# Altium PCB sumobot.PcbDoc
Units mm, origin at the board's own origin, x right, y up, seen from the top; angles counter-clockwise.
Board outline 94 x 94.75 mm, 2 copper layers (Top Layer, Bottom Layer); 86 components, 75 nets, 343 pads, 114 vias.
Unrouted connection lines stored in the file: 2.
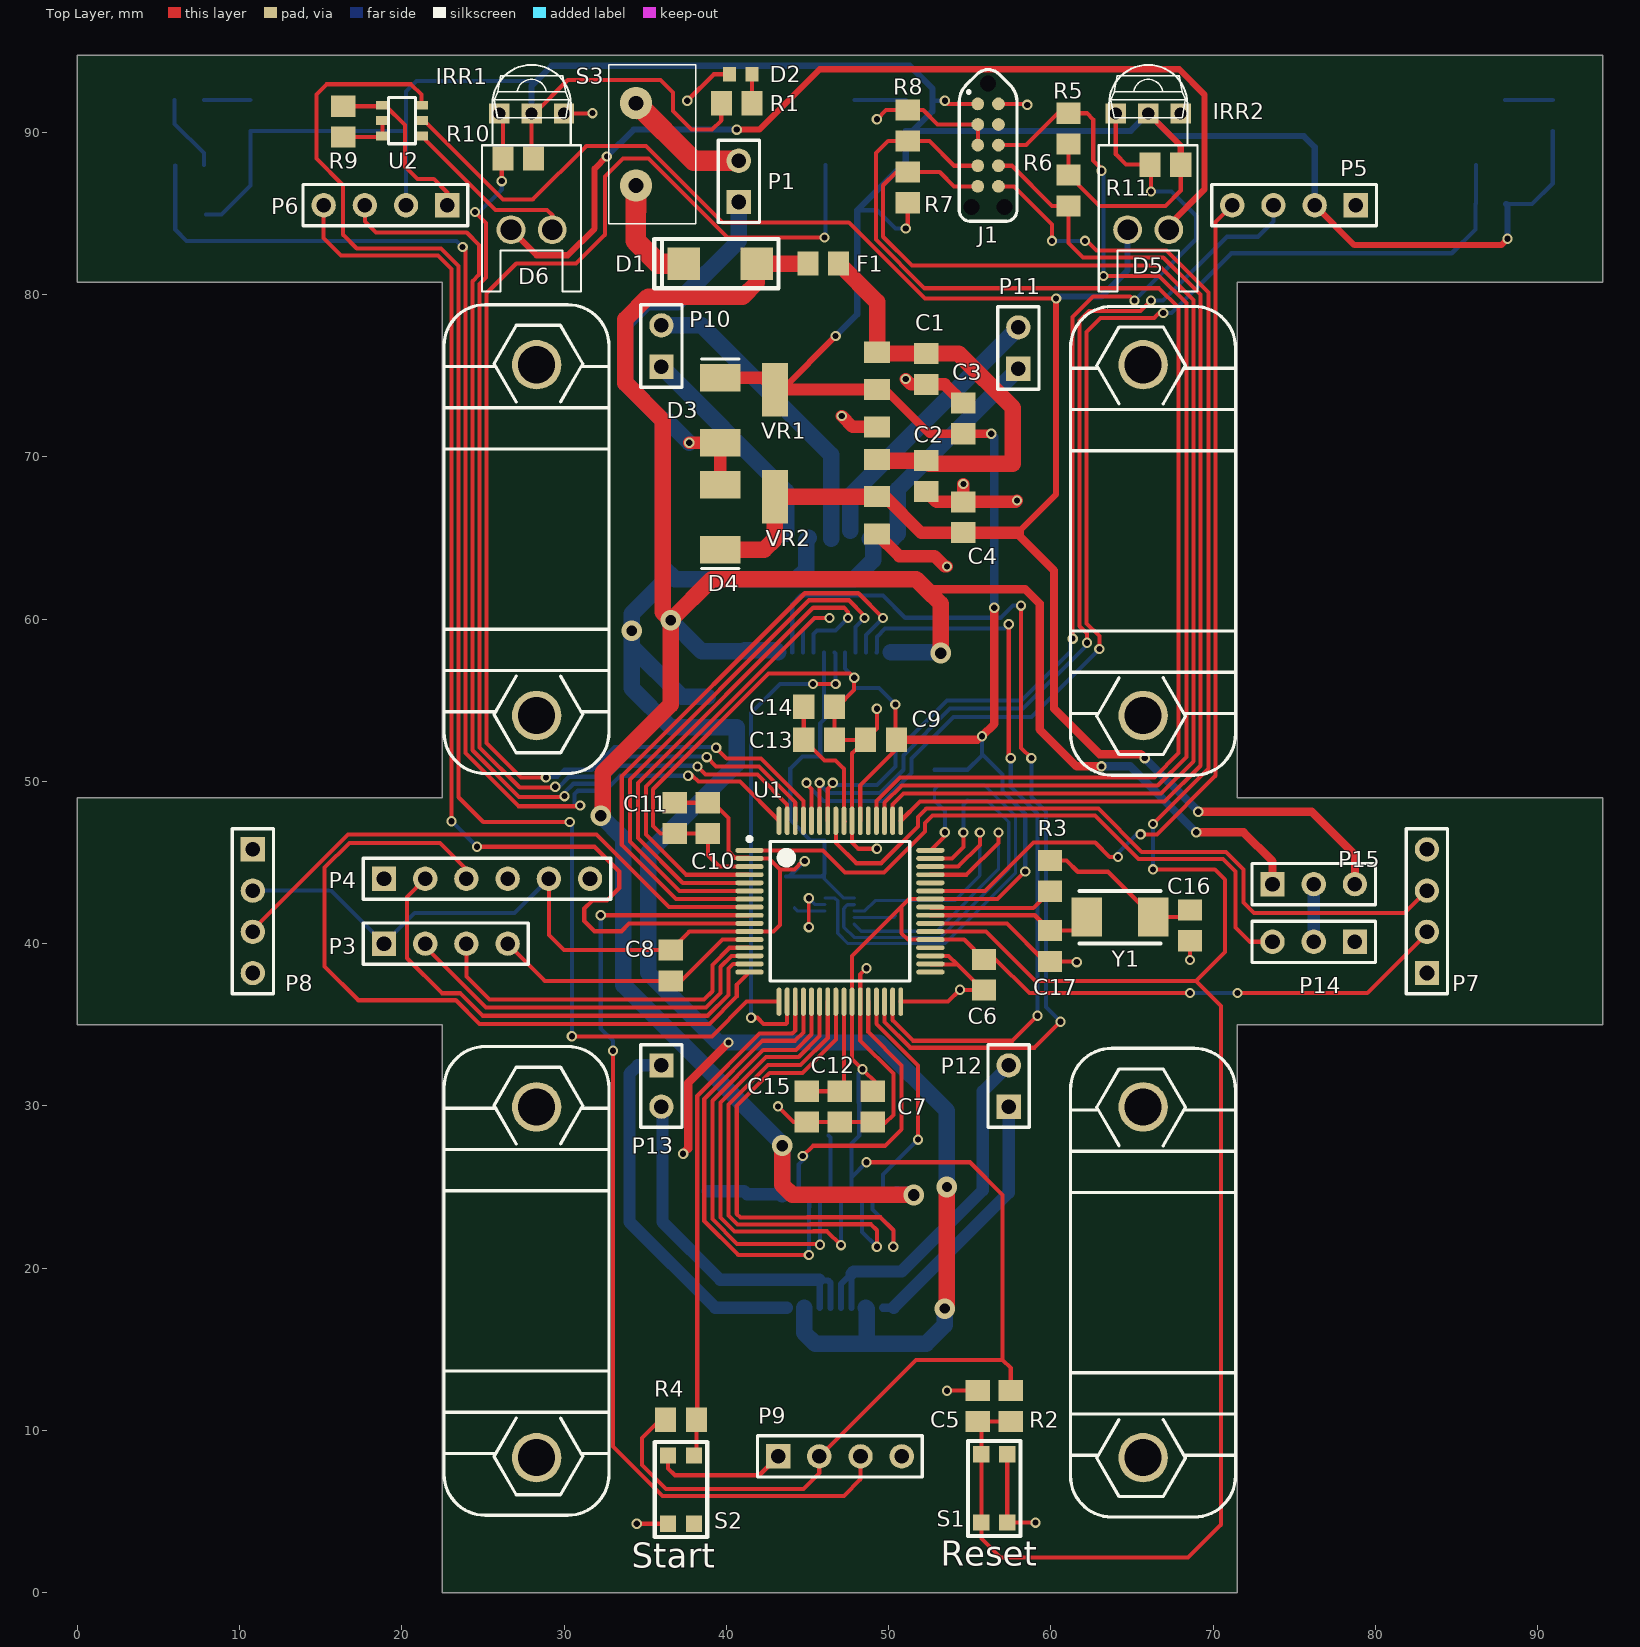
[diagram p0: Top Layer view]
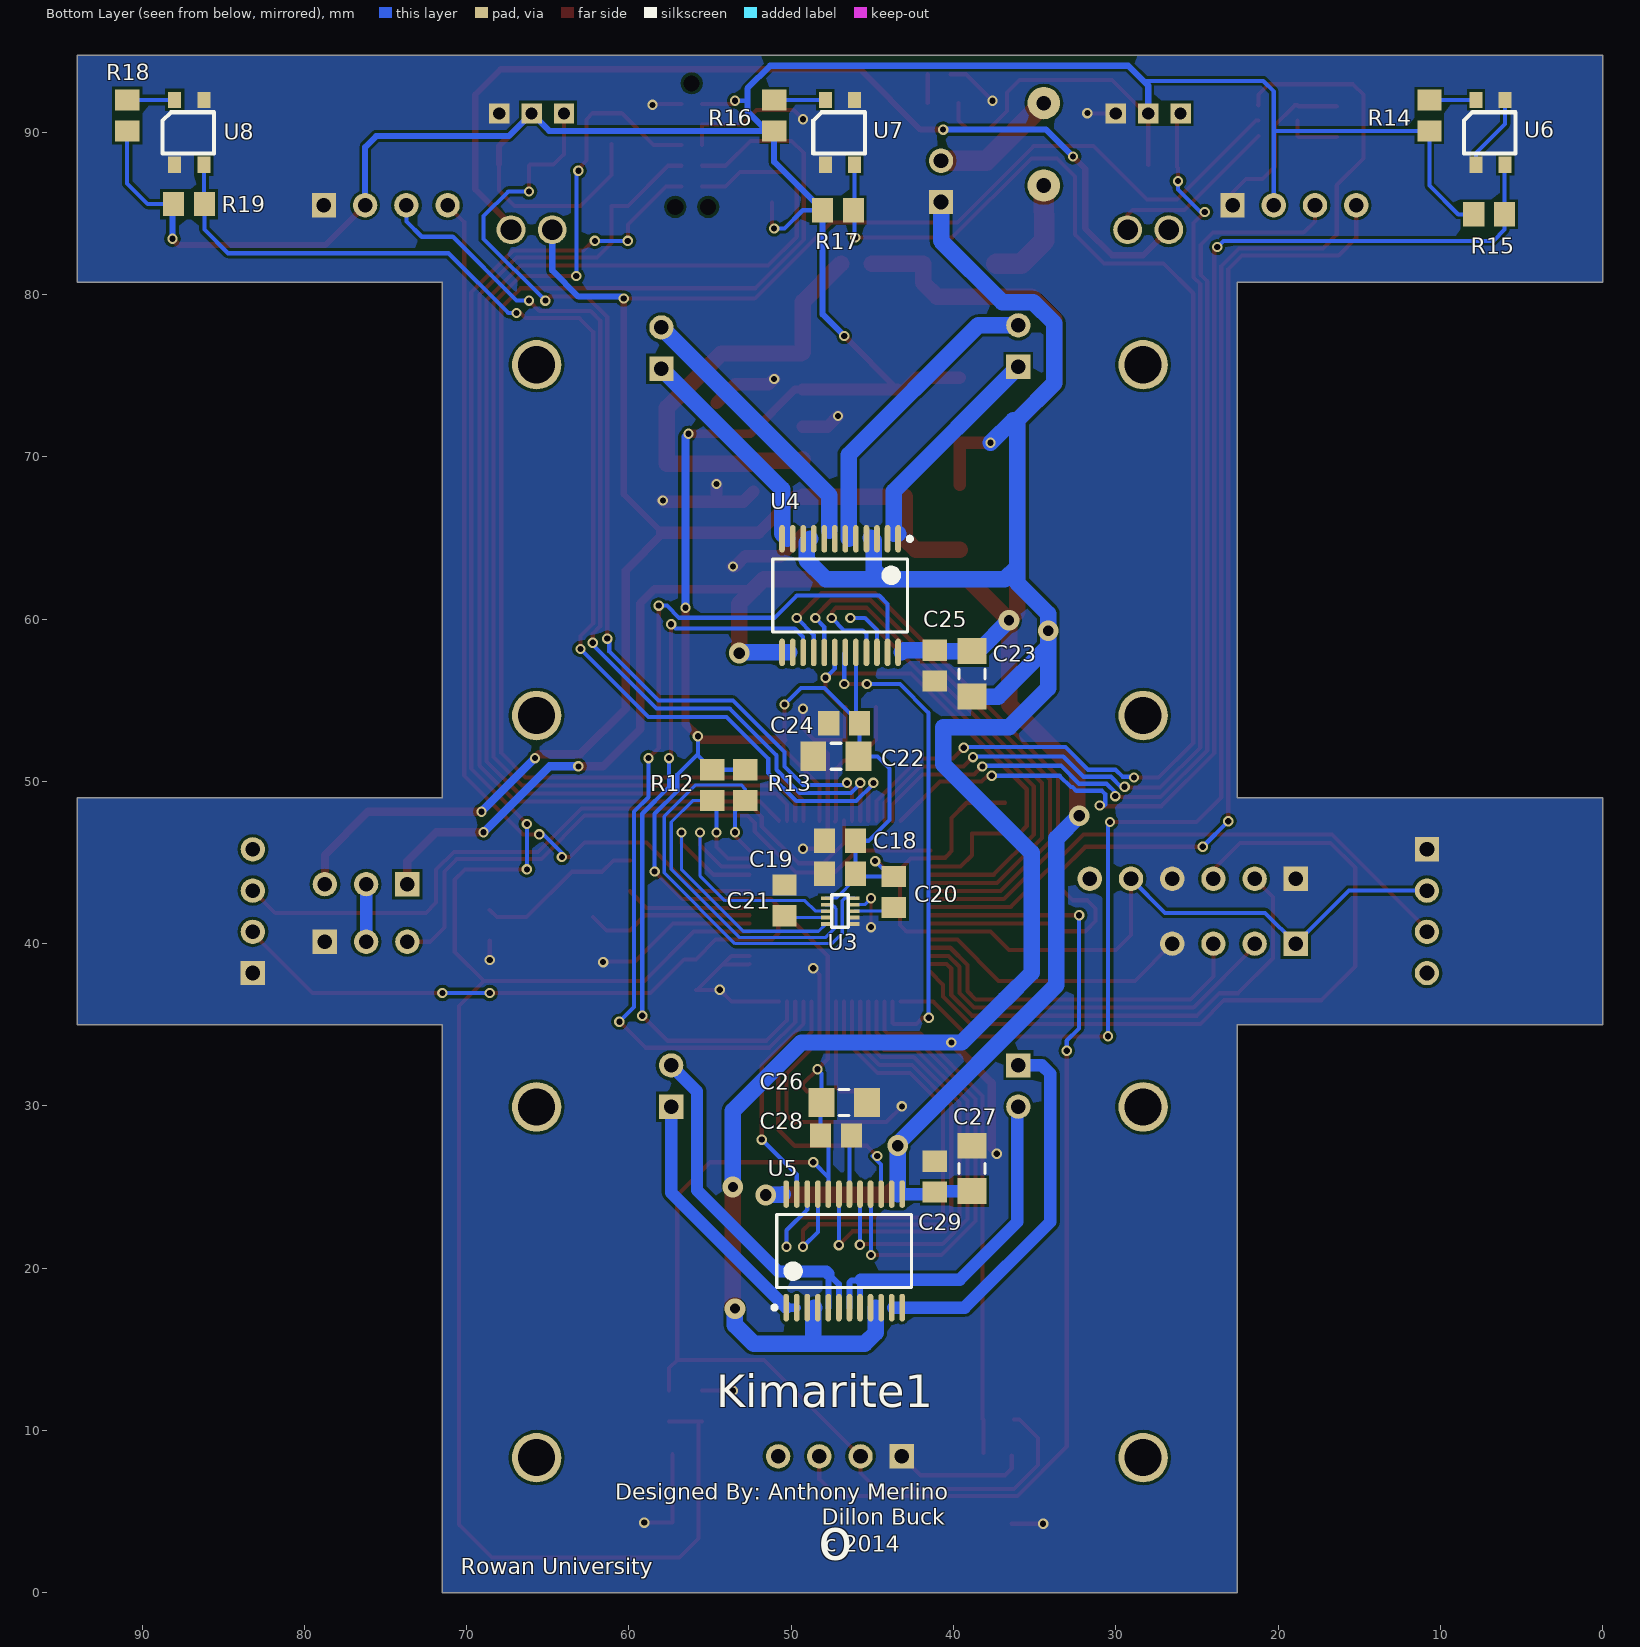
[diagram p1: Bottom Layer view, seen from below]

## Layer stack, top to bottom
Top Solder: solder mask 0.0102, Solder Resist, Dk 3.5
Top Layer: signal copper 0.0356
Dielectric 1: dielectric 0.32, FR-4, Dk 4.8
Bottom Layer: signal copper 0.0356
Bottom Solder: solder mask 0.0102, Solder Resist, Dk 3.5

## Board outline
22.5,0 22.5,35 0,35 0,49 22.5,49 22.5,80.75 0,80.75 0,94.75 94,94.75 94,80.75 71.5,80.75 71.5,49 94,49 94,35 71.5,35 71.5,0

## Design rules (kind name [scope] priority, off if disabled: settings)
Clearance [All] p1: gap=0.178
ComponentClearance [All] p1 off: gap=0.254 collisioncheckmode=3 verticalgap=0.254 showdistances=FALSE
MinimumSolderMaskSliver [All] p1 off: minsoldermaskwidth=0.254
MinimumSolderMaskSliver SilkscreenOverComponentPads [All] p2 off: minsoldermaskwidth=0.254
PlaneConnect [All] p1: planeconnectstyle=Direct reliefexpansion=0.508 reliefentries=4 reliefconductorwidth=0.254 reliefairgap=0.254
PolygonConnect [All] p1: connectstyle=Direct reliefconductorwidth=0.254 reliefentries=4 polygonreliefangle="90 Angle" airgapwidth=0.254
RoutingVias [All] p1: holewidth=0.711 width=1.27 viastyle="Through Hole" minholewidth=0.203 minwidth=0.508 maxholewidth=0.965 maxwidth=1.27
SilkToSilkClearance [All] p1 off: silktosilkclearance=0.254
SolderMaskExpansion [All] p1: expansion=0.102
UnpouredPolygon [All] p1: allowunpoured=FALSE
Width [All] p1: maxlimit=1.27 minlimit=0.178 preferedwidth=0.203
25 further rules are at their usual default settings.

## Classes and differential pairs
component class Servo: P14 P15
component class Reflective_Sensors: R14 R15 R16 R17 R18 R19 U6 U7 U8
component class Proximity_Sensors: D5 IRR1 IRR2 P5 P6 P7 P8 P9 R9 R10 R11 U2
component class Power_Regulation: C1 C2 C3 C4 D1 D2 D3 D4 F1 P1 R1 S3 VR1 VR2
component class Motor_Control: C22 C23 C24 C25 C26 C27 C28 C29 P10 P11 P12 P13 U4 U5
component class microcontroller: C5 C6 C7 C8 C9 C10 C11 C12 C13 C14 C15 C16 C17 J1 P3 P4 R2 R3 R4 R5 R6 R7 R8 S1 S2 Y1
component class Accelerometer: C18 C19 C20 C21 R12 R13 U3

## Components (designator, comment, footprint, x,y, rotation, side; value= is the part's Value field where it differs from the comment)
C1 "Cap" 0805 52.324,75.422 r90 top
C2 "Cap" 0805 52.324,68.818 r90 top
C3 "Cap" 0805 54.61,72.374 r270 top
C4 "Cap" 0805 54.61,66.278 r270 top
C5 "Cap" 0805 55.499,11.512 r270 top
C6 "Cap" 0805 55.88,38.084 r90 top
C7 "Cap" 0805 49.022,29.956 r90 top
C8 "Cap" 0805 36.576,38.658 r90 top
C9 "Cap" 0805 49.53,52.562 r0 top
C10 "Cap" 0805 38.862,47.736 r90 top
C11 "Cap" 0805 36.83,47.736 r90 top
C12 "Cap" 0805 46.99,29.956 r90 top
C13 "Cap" 0805 45.72,52.562 r180 top
C14 "Cap" 0805 45.72,54.594 r180 top
C15 "Cap" 0805 44.958,29.956 r90 top
C16 "Cap" 0805 68.58,41.132 r90 top
C17 "Cap" 0805 59.944,39.862 r90 top
C18 "Cap" 0805 46.99,46.339 r180 bottom
C19 "Cap" 0805 46.99,44.307 r180 bottom
C20 "Cap" 0805 43.688,43.18 r90 bottom
C21 "Cap" 0805 50.419,42.672 r270 bottom
C22 "Cap Pol" 1206 47.244,51.546 r0 bottom
C23 "Cap Pol" 1206 38.862,56.626 r270 bottom
C24 "Cap" 0805 46.736,53.578 r180 bottom
C25 "Cap" 0805 41.148,57.134 r90 bottom
C26 "Cap Pol" 1206 46.736,30.21 r180 bottom
C27 "Cap Pol" 1206 38.862,26.146 r90 bottom
C28 "Cap" 0805 47.244,28.178 r0 bottom
C29 "Cap" 0805 41.148,25.638 r270 bottom
D1 "Diode" SMA 39.624,81.915 r0 top
D2 "LED" 0603 40.894,93.583 r180 top
D3 "3.9V" DO-214AC 39.624,72.882 r270 top
D4 "5.5V" DO-214AC 39.624,66.278 r90 top
D5 "LED" LED-Bent 66,84 r180 top
D6 "LED" LED-Bent 28,84 r180 top
F1 "Fuse" 0805 45.974,81.915 r180 top
IRR1 "TSL262R" TSL262R 28,92 r180 top
IRR2 "TSL262R" TSL262R 66,92 r180 top
J1 "JTAG" "TAG Connect 10p" 56.134,91.755 r270 top
P1 "Header 2" HDR1X2 40.767,85.709 r90 top
P3 "UART_DEBUG" HDR1X4 18.9,40 r0 top locked
P4 "BLUETOOTH MODULE" HDR1X6 18.9,44 r0 top
P5 "Header 4" HDR1X4 78.8,85.51 r180 top
P6 "Header 4" HDR1X4 22.8,85.51 r180 top
P7 "Header 4" HDR1X4 83.18,38.19 r90 top
P8 "Header 4" HDR1X4 10.82,45.81 r270 top
P9 "Header 4" HDR1X4 43.19,8.4 r0 top locked
P10 "Header 2" HDR1X2 36,75.565 r90 top
P11 "Header 2" HDR1X2 58,75.438 r90 top
P12 "Header 2" HDR1X2 57.404,29.956 r90 top
P13 "Header 2" HDR1X2 36,32.496 r270 top
P14 "Header 3" HDR1X3 78.74,40.116 r180 top
P15 "Header 3" HDR1X3 73.66,43.672 r0 top
R1 "Resistor" 0805 40.64,91.805 r180 top
R2 "Resistor" 0805 57.531,11.512 r90 top
R3 "Resistor" 0805 59.944,44.18 r270 top
R4 "Resistor" 0805 37.211,10.668 r180 top
R5 "Resistor" 0805 61.087,90.231 r270 top
R6 "Resistor" 0805 61.087,86.421 r90 top
R7 "Resistor" 0805 51.181,86.614 r270 top
R8 "Resistor" 0805 51.181,90.424 r270 top
R9 "Resistor" 0805 16.383,90.662 r270 top
R10 "Resistor" 0805 27.178,88.392 r180 top
R11 "Resistor" 0805 67.056,88.011 r180 top
R12 "Resistor" 0805 54.864,49.768 r90 bottom
R13 "Resistor" 0805 52.832,49.768 r90 bottom
R14 "Resistor" 0805 10.668,91.043 r270 bottom
R15 "Resistor" 0805 6.985,84.947 r0 bottom
R16 "Resistor" 0805 51.054,91.043 r270 bottom
R17 "Resistor" 0805 47.117,85.201 r0 bottom
R18 "Resistor" 0805 90.932,91.043 r270 bottom
R19 "Resistor" 0805 87.122,85.582 r0 bottom
S1 "KMR4" KMR4 56.515,6.432 r270 top
S2 "KMR4" KMR4 37.211,6.35 r90 top
S3 "SW-SPST" "SPST Switch" 35.433,89.265 r180 top
U1 "TM4C123GH6PM" TSQFP50P1200X1200X145-64N 47,42 r0 top
U2 "AL5802" SOT26 21.209,89.773 r180 top
U3 "MMA8653FC" DFN-10 47.879,42.808 r180 bottom
U4 "TB6612FNG" SSOP24-P-300-0.65A 46.99,61.452 r270 bottom
U5 "TB6612FNG" SSOP24-P-300-0.65A 46.736,21.066 r90 bottom locked
U6 "QRE1113GR" QRE1113GR 6,92 r270 bottom
U7 "QRE1113GR" QRE1113GR 46.1,92 r270 bottom
U8 "QRE1113GR" QRE1113GR 86.2,92 r270 bottom
VR1 "AP1117" SOT-223 46.99,74.152 r90 top
VR2 "AP1117" SOT-223 46.99,67.548 r90 top
Y1 "XTAL" ABM3_SERIES 64.262,41.64 r180 top

## Footprints (in the part's own frame and the unit in brackets; to place one, negate y for a bottom-side part, rotate by r counter-clockwise, add the part's x,y. Pads: shape width x height; smd on the part's side, far side on the other; paste and mask are expansions set on the pad)
0603 [mm] "Chip Capacitor; Body 1.6 x 0.8 mm (LxW typ)"
  rect 0.8x0.9 smd: 1(-0.7,0) 2(0.7,0)
  body extent -0.87,-0.48 0.87,0.48, height 1.3
0805 [mm] "Chip Resistor; Body 2.0 x 1.3 mm (LxW typ)"
  rect 1.3x1.5 smd: 1(-0.95,0) 2(0.95,0)
1206 [mm] "Chip Resistor; Body 3.2 x 1.6 mm (LxW typ)"
  rect 1.6x1.8 smd: 1(-1.4,0) 2(1.4,0)
  silkscreen extent -0.3,-0.8 0.3,0.8
ABM3_SERIES [mm] "2-SMD"
  rect 1.9x2.4 smd: 1(-2.05,0) 2(2.05,0)
  silkscreen extent -2.5,-1.6 2.5,1.63
DFN-10 [mm]
  rect 0.6x0.225 smd: 1(0,0) 2(0,-0.4) 3(0,-0.8) 4(0,-1.2) 5(0,-1.6) 6(1.8,-1.6) 7(1.8,-1.2) 8(1.8,-0.8) 9(1.8,-0.4) 10(1.8,0)
  silkscreen extent 0.38,-1.8 1.4,0.2
DO-214AC [mm] "Molded Diode, 2-Leads, Body 4.3x2.6mm, IPC Medium Density"
  rect 1.7x2.5 smd: 1(-2,0) 2(2,0)
  silkscreen extent -3.15,-1.15 -3.15,1.15, body extent -2.6,-1.27 2.6,1.33, height 2.4
HDR1X2 [mm] "Connector; Header; 2 Position"
  rect 1.5x1.5 hole 0.9: 1(0,0)
  round 1.5 hole 0.9: 2(2.54,0)
  silkscreen extent -1.27,-1.27 3.81,1.27
HDR1X3 [mm] "Connector; Header; 3 Position"
  rect 1.5x1.5 hole 0.9: 1(0,0)
  round 1.5 hole 0.9: 2(2.54,0) 3(5.08,0)
  silkscreen extent -1.27,-1.27 6.35,1.27
HDR1X4 [mm] "Connector; Header; 4 Position"
  rect 1.5x1.5 hole 0.9: 1(0,0)
  round 1.5 hole 0.9: 2(2.54,0) 3(5.08,0) 4(7.62,0)
  silkscreen extent -1.27,-1.27 8.89,1.27
HDR1X6 [mm] "Connector; Header; 6 Position"
  rect 1.5x1.5 hole 0.9: 1(0,0)
  round 1.5 hole 0.9: 2(2.54,0) 3(5.08,0) 4(7.62,0) 5(10.16,0) 6(12.7,0)
  silkscreen extent -1.27,-1.27 13.97,1.27
KMR4 [mm]
  rect 1x1 smd: 1(2.1,0.8) 2(2.1,-0.8) 3(-2.1,0.8) 4(-2.1,-0.8)
  silkscreen extent -2.91,-1.61 2.94,1.63
LED-Bent [mil] "LED; 2 Leads"
  round 70 hole 50: 1(50,0) 2(-50,0)
  silkscreen extent -120,-400 120,150
QRE1113GR [mm]
  rect 1x0.8 smd: 1(0,-1.8) 2(4,-1.8) 3(4,0) 4(0,0)
  silkscreen extent 0.76,-2.54 3.3,0.63
SMA [mm]
  rect 2x2 smd: 1(-2.25,0) 2(2.25,0)
  silkscreen extent -4.06,-1.52 3.6,1.52
SOT26 [mm]
  rect 0.8x0.55 smd: 1(0,0) 2(0,-0.95) 3(0,-1.9) 4(2.4,-1.9) 5(2.4,-0.95) 6(2.4,0)
  silkscreen extent 0.37,-2.38 2.03,0.48
SOT-223 [mm]
  rect 1.3x1.6 smd: 1(-2.3,-2.3) 2(0,-2.3) 3(2.3,-2.3)
  rect 3.3x1.6 smd: 4(0,4)
"SPST Switch" [mm]
  round 2 hole 0.9: 1(1,2.54) 2(1,-2.54)
  silkscreen extent -2.69,-4.9 2.69,4.9
SSOP24-P-300-0.65A [mm] "TSOP, 24-Leads, Body 8.3x5.6mm (max), Pitch 0.65mm, IPC Medium Density"
  oval 1.7x0.35 smd: 1(-3.5,3.575) 2(-3.5,2.925) 3(-3.5,2.275) 4(-3.5,1.625) 5(-3.5,0.975) 6(-3.5,0.325) 7(-3.5,-0.325) 8(-3.5,-0.975) 9(-3.5,-1.625) 10(-3.5,-2.275) 11(-3.5,-2.925) 12(-3.5,-3.575) 13(3.5,-3.575) 14(3.5,-2.925) 15(3.5,-2.275) 16(3.5,-1.625) 17(3.5,-0.975) 18(3.5,-0.325) 19(3.5,0.325) 20(3.5,0.975) 21(3.5,1.625) 22(3.5,2.275) 23(3.5,2.925) 24(3.5,3.575)
  silkscreen extent -3.62,-4.15 2.25,4.42, body extent -2.8,-4.15 2.8,4.15, height 1.6
"TAG Connect 10p" [mil] "TAG Connect 10 Pin 2050"
  round 35 hole 39 unplated: 0(-50,0) 0(250,-40) 0(250,40)
  round 31 smd: 1(0,-25) 2(0,25) 3(50,-25) 4(50,25) 5(100,-25) 6(100,25) 7(150,-25) 8(150,25) 9(200,-25) 10(200,25)
  silkscreen extent -83,-70 285,70
TSL262R [mm] "IR Receiver"
  rect 1.25x1.25 hole 0.75: 0(-2,0.83) 1(0,0.83) 2(2,0.83)
  silkscreen extent -2.3,-1.5 2.3,1.1
TSQFP50P1200X1200X145-64N [mm] "TSQFP, 64-Leads, Body 10.00x10.00mm, Pitch 0.50mm, IPC Medium Density"
  oval 1.75x0.3 smd: 1(-5.575,3.75) 2(-5.575,3.25) 3(-5.575,2.75) 4(-5.575,2.25) 5(-5.575,1.75) 6(-5.575,1.25) 7(-5.575,0.75) 8(-5.575,0.25) 9(-5.575,-0.25) 10(-5.575,-0.75) 11(-5.575,-1.25) 12(-5.575,-1.75) 13(-5.575,-2.25) 14(-5.575,-2.75) 15(-5.575,-3.25) 16(-5.575,-3.75) 33(5.575,-3.75) 34(5.575,-3.25) 35(5.575,-2.75) 36(5.575,-2.25) 37(5.575,-1.75) 38(5.575,-1.25) 39(5.575,-0.75) 40(5.575,-0.25) 41(5.575,0.25) 42(5.575,0.75) 43(5.575,1.25) 44(5.575,1.75) 45(5.575,2.25) 46(5.575,2.75) 47(5.575,3.25) 48(5.575,3.75)
  oval 0.3x1.75 smd: 17(-3.75,-5.575) 18(-3.25,-5.575) 19(-2.75,-5.575) 20(-2.25,-5.575) 21(-1.75,-5.575) 22(-1.25,-5.575) 23(-0.75,-5.575) 24(-0.25,-5.575) 25(0.25,-5.575) 26(0.75,-5.575) 27(1.25,-5.575) 28(1.75,-5.575) 29(2.25,-5.575) 30(2.75,-5.575) 31(3.25,-5.575) 32(3.75,-5.575) 49(3.75,5.575) 50(3.25,5.575) 51(2.75,5.575) 52(2.25,5.575) 53(1.75,5.575) 54(1.25,5.575) 55(0.75,5.575) 56(0.25,5.575) 57(-0.25,5.575) 58(-0.75,5.575) 59(-1.25,5.575) 60(-1.75,5.575) 61(-2.25,5.575) 62(-2.75,5.575) 63(-3.25,5.575) 64(-3.75,5.575)
  silkscreen extent -5.7,-4.3 4.3,4.57, body extent -5,-5 5,5, height 1.45

## Part data
C1 C2 C3 C4 C5 C6 C7 C8 C9 C10 C11 C12 C13 C14 C15 C16 C17 C18 C19 C20 C21 C24 C25 C28 C29: "Capacitor"
C22 C23 C26 C27: "Polarized Capacitor"
D1: "Default Diode"
D3 D4: library part "Zener Diode"
J1: library part "10-Pin JTAG ARM", "10-Pin JTAG Connector for Cortex M4 etc."
P1 P10 P11 P12 P13: "Header, 2-Pin"
P3: library part "Header 4", "Header, 4-Pin"
P4: library part "Header 6", "Header, 6-Pin"
P5 P6 P7 P8 P9: "Header, 4-Pin"
P14 P15: "Header, 3-Pin"
S1 S2: library part "SPST Tactile Switch", "Switch"
S3: "Single-Pole, Single-Throw Switch"
U1: "Tiva C TM4C123GH6PM"
U3: "MMA8653FC Accelerometer 3-Axis"
Y1: "Crystal Oscillator"

## Free pads (board coordinates)
  round 3.048 hole 2.286: ""(28.31,8.32) ""(28.31,29.94) ""(28.31,54.06) ""(28.31,75.68) ""(65.69,8.32) ""(65.69,29.94) ""(65.69,54.06) ""(65.69,75.68)

## Via types
v1: diameter 0.635, hole 0.381, Top Layer to Bottom Layer, 106 vias
v2: diameter 1.27, hole 0.711, Top Layer to Bottom Layer, 4 vias
v3: diameter 1.27, hole 0.635, Top Layer to Bottom Layer, 4 vias

## Nets (pads, with @x,y where several pads share a name; then routed paths per layer and width w, separated by ;. In a path a pad name is that pad's centre, name@x,y a point inside that pad or via, vN(x,y) a via of type N, cw(c..) or ccw(c..) an arc to the next point about the centre after c; other vN are vias at no path point)
3.3V: C3.2 C6.2 C7.2 C8.2 C9.2 C10.2 C11.2 C18.2 C19.2 C20.2 C22.1 C24.2 C26.1 C28.2 D3.1 IRR1.1 IRR2.1 J1.1 P3.1 P4.5 P5.2 P6.2 P7.2 P8.2 P9.2 R1.2 R2.2 R4.2 R5.2 R6.2 R7.2 R10.1 R11.1 R12.2 R13.2 R14.2 R15.2 R16.2 R17.2 R18.2 R19.2 U1.2 U1.11 U1.26 U1.37 U1.42 U1.54 U3.1 U4.20 U5.20 VR1.2 VR1.4 | length 442.4
  Top Layer w0.254: R10.1@28,87.996 IRR1.1 28.178,91.17 30.226,93.218 35.941,93.218 36.703,92.456 36.703,91.313 37.846,90.17 39.116,90.17 39.69,90.744 R1.2 ; P4.5 29.06,40.536 29.988,39.608 C8.2 37.718,40.75 U1.11 42.909,40.75 43.307,41.148 43.307,44.577 ; R4.2 35.941,10.668 34.798,9.525 34.798,7.874 36.271,6.401 44.755,6.401 45.73,7.376 P9.2 51.681,14.351 57.023,14.351 ; C11.2 C10.2 39.182,48.686 40.132,47.736 40.132,45.704 40.245,45.591 40.245,45.562 40.512,45.295 41.38,45.295 U1.2 42.634,45.25 43.307,44.577 ; v1(44.831,45.085) 44.704,45.085 44.196,44.577 43.307,44.577 ; U1.54 48.25,49.758 50.48,51.988 C9.2 50.419,52.623 v1(50.419,54.737) ; v1(48.641,26.527) 55.007,26.527 57.023,24.511 57.023,14.351 ; C7.2 49.276,31.16 49.276,31.369 v1(48.387,32.258) 47.75,32.895 U1.26 47.75,39.241 50.8,42.291 ; v1(51.054,84.074) 51.181,84.201 R7.2 ; v1(53.467,91.948) 53.66,91.755 J1.1 ; R2.2 57.531,13.843 57.023,14.351 ; v1(58.42,44.45) 56.72,42.75 U1.42 51.259,42.75 50.8,42.291 ; R5.2 R6.2 62.987,85.471 67.056,85.471 68.006,86.421 R11.1 ; v1(68.58,36.957) 68.573,36.964 62.607,36.964 62.601,36.957 58.674,36.957 56.597,39.034 C6.2 54.664,40.25 U1.37 51.19,40.25 50.8,40.64 50.8,42.291 ; v1(71.501,36.957) 79.502,36.957 83.18,40.635 P7.2
  Top Layer w0.381: VR1.4 43.434,74.152 v1(46.736,77.454) ; IRR2.1 68.006,89.164 R11.1 ; P5.2 78.712,83.058 87.757,83.058 v1(88.138,83.439)
  Top Layer w0.508: VR1.2 49.784,74.152 52.512,71.424 C3.2 v1(56.327,71.424) ; C9.2 55.483,52.562 ; v1(55.753,52.787) 56.515,53.549 v1(56.515,60.706)
  Top Layer w0.762: D3.1 42.26,74.882 VR1.4 ; VR1.4@43.434,74.152 VR1.2
  Bottom Layer w0.203: C19.2 46.04,44.003 47.235,42.808 U3.1
  Bottom Layer w0.254: R15.2 8.89,84.947 10.668,86.725 R14.2 20.171,90.093 20.26,90.182 ; P8.2 15.63,43.27 P3.1 20.794,41.894 26.954,41.894 P4.5 ; P6.2 20.26,90.182 ; 28.292,93.173 20.91,93.173 20.26,92.523 20.26,90.182 ; C20.2 C20.2@43.876,44.13 ; v1(44.831,45.085) C20.2@43.876,44.13 ; C22.1@45.786,51.604 C24.2 C24.2@46.015,53.807 ; C22.1 44.688,51.546 43.942,50.8 43.942,47.625 45.228,46.339 C18.2 C19.2 45.863,44.13 C20.2@43.876,44.13 ; U4.20 C24.2@46.015,53.807 ; U5.20 47.711,25.597 ; R17.2 49.292,85.201 50.419,84.074 v1(51.054,84.074) ; C26.1 48.136,32.007 v1(48.387,32.258) v1@48.387,32.391 ; C26.1@48.194,30.152 C28.2 47.711,27.695 47.711,25.597 ; v1(48.641,26.527) 47.711,25.597 ; v1(50.419,54.737) 49.403,55.753 47.961,55.753 C24.2@46.015,53.807 ; 52.705,92.004 52.761,91.948 v1(53.467,91.948) ; R13.2 R12.2 55.753,51.607 55.753,51.689 ; v1(55.753,52.787) 55.753,51.689 ; v1(58.42,44.45) 58.42,48.006 57.023,49.403 57.023,50.419 55.753,51.689 ; v1(68.58,36.957) v1(71.501,36.957) ; R19.2 89.662,85.582 90.932,86.852 R18.2
  Bottom Layer w0.381: IRR1.1 28,92.881 29.226,94.107 51.308,94.107 52.705,92.71 52.705,92.004 52.705,91.297 R16.2@51.501,90.093 ; v1(46.736,77.454) 48.067,78.785 R17.2 51.054,88.188 R16.2 R16.2@51.501,90.093 ; P5.2 76.26,89.094 75.581,89.773 67.397,89.773 IRR2.1 64.923,90.093 R16.2@51.501,90.093 ; R19.2 88.138,85.516 v1(88.138,83.439)
  Bottom Layer w0.508: v1(56.327,71.424) 56.515,71.236 v1(56.515,60.706)
5V: C4.2 D4.1 D5.1 P15.3 U2.2 VR2.2 VR2.4 | length 127.5
  Top Layer w0.254: U2.2 21.365,90.723 26.236,85.852 28.067,85.852 31.369,89.154 35.052,89.154 39.751,84.455 47.547,84.455 52.246,79.756 v1(60.325,79.756)
  Top Layer w0.381: 57.962,65.328 60.325,67.691 v1(60.325,79.756)
  Top Layer w0.508: 57.862,65.328 60.198,62.992 60.198,54.483 63.005,51.676 65.545,51.676 v1(65.786,51.435) ; v1(69.088,48.133) 76.073,48.133 78.74,45.466 P15.3
  Top Layer w0.762: VR2.2 49.784,67.548 52.004,65.328 C4.2 57.962,65.328
  Top Layer w1.016: D4.1 42.323,64.278 42.99,64.945 VR2.4 VR2.2
  Bottom Layer w0.381: v1(60.325,79.756) 60.452,79.883 63.119,79.883 64.73,81.494 D5.1
  Bottom Layer w0.508: v1(65.786,51.435) v1(69.088,48.133)
ACCEL_INT1: U1.46 U3.3 | length 15.7
  Top Layer w0.254: U1.46 54.291,44.75 55.626,46.085 v1(55.626,46.847)
  Bottom Layer w0.203: U3.3 47.887,42.016 48.524,42.016 49.164,42.657 54.087,42.657 55.626,44.196 v1(55.626,46.847)
ACCEL_INT2: U1.45 U3.5 | length 18.6
  Top Layer w0.254: U1.45 54.807,44.25 56.769,46.212 v1(56.769,46.847)
  Bottom Layer w0.203: U3.5 48.32,40.767 52.959,40.767 56.769,44.577 v1(56.769,46.847)
ACCEL_SCL: R12.1 U1.47 U3.2 | length 25.3
  Top Layer w0.254: U1.47 53.902,45.25 54.61,45.958 v1(54.61,46.847)
  Bottom Layer w0.203: U3.2 47.871,42.4 47.463,42.4 47.3,42.237 47.3,42.22 47.244,42.164 47.244,41.021 47.879,40.386 53.213,40.386 57.404,44.577 57.404,47.498 56.084,48.818 R12.1
  Bottom Layer w0.254: v1(54.61,46.847) 54.61,48.564 R12.1
ACCEL_SDA: R13.1 U1.48 U3.10 | length 29.7
  Top Layer w0.254: U1.48 53.467,46.642 v1(53.467,46.872)
  Bottom Layer w0.203: U3.10 46.696,42.808 46.863,42.641 46.863,40.64 47.498,40.005 53.467,40.005 57.823,44.361 57.823,47.841 55.88,49.784 53.086,49.784 52.832,49.53 R13.1
  Bottom Layer w0.254: R13.1 53.467,48.183 v1(53.467,46.872)
AN_IR_BACK: P9.3 U1.9 | length 60.6
  Top Layer w0.254: v1(32.258,41.75) U1.9 ; v1(33.02,33.401) 33.02,9.017 36.068,5.969 47.244,5.969 48.27,6.995 P9.3
  Bottom Layer w0.254: v1(32.258,41.75) 32.258,34.782 33.02,34.02 v1(33.02,33.401)
AN_IR_CLOSE_FRONTLEFT: IRR1.2 R10.2 U1.62 | length 63.7
  Top Layer w0.254: v1(24.511,85.09) 25.197,84.404 25.197,81.05 24.79,80.644 24.79,52.099 27.269,49.62 29.405,49.62 v1(29.453,49.668) ; v1(26.162,86.995) 26.162,87.802 26.228,87.868 R10.2 IRR1.2@26.228,90.942 ; v1(38.795,51.495) 39.374,50.917 42.021,50.917 44.25,48.688 U1.62
  Bottom Layer w0.254: v1(24.511,85.09) 24.765,85.09 26.162,86.487 v1(26.162,86.995) ; v1(29.453,49.668) 29.674,49.668 30.292,50.286 31.981,50.286 33.238,51.543 38.748,51.543 v1(38.795,51.495)
AN_IR_CLOSE_FRONTRIGHT: IRR2.2 R11.2 U1.58 | length 63.1
  Top Layer w0.254: U1.58 46.25,49.531 46.563,49.844 v1(46.563,49.911) ; v1(61.341,58.801) 61.341,78.613 62.611,79.883 64.897,79.883 v1(65.151,79.629) ; IRR2.2 64,88.654 64.643,88.011 R11.2 66.167,87.95 v1(66.167,86.36) v1@66.106,86.421
  Bottom Layer w0.254: v1(46.563,49.911) 46.69,49.784 49.276,49.784 50.419,50.927 50.419,51.816 53.594,54.991 58.19,54.991 61.214,58.015 61.214,58.674 v1(61.341,58.801) ; v1(65.151,79.629) 68.961,83.439 68.961,84.836 67.437,86.36 v1(66.167,86.36)
AN_IR_FRONTLEFT: P6.3 U1.63 | length 63.5
  Top Layer w0.254: P6.3 17.72,84.515 18.415,83.82 24.003,83.82 24.765,83.058 24.765,81.229 24.359,80.823 24.359,51.92 27.233,49.046 29.98,49.046 v1(30.028,49.093) ; v1(38.221,50.921) 38.724,50.417 41.91,50.417 43.75,48.577 U1.63
  Bottom Layer w0.254: v1(30.028,49.093) 30.028,49.314 30.567,49.854 32.256,49.854 33.37,50.968 38.173,50.968 v1(38.221,50.921)
AN_IR_FRONTRIGHT: P5.3 U1.59 | length 59
  Top Layer w0.254: U1.59 v1(45.75,49.911) ; v1(62.23,58.547) 62.23,59.106 61.773,59.563 61.773,78.41 62.357,78.994 65.532,78.994 v1(66.167,79.629)
  Bottom Layer w0.254: v1(45.75,49.911) 45.75,49.844 46.31,49.284 49.483,49.284 50.919,50.72 50.919,51.609 53.793,54.483 58.293,54.483 62.103,58.293 v1@62.103,58.547 ; v1(66.167,79.629) 66.921,79.629 70.858,83.566 72.771,83.566 73.72,84.515 P5.3
AN_IR_LEFT: P8.3 U1.8 | length 35
  Top Layer w0.254: P8.3 10.82,40.879 16.677,46.736 31.988,46.736 36.474,42.25 U1.8
AN_IR_RIGHT: P7.3 U1.57 | length 44.5
  Top Layer w0.254: U1.57 46.75,46.214 48.006,44.958 49.546,44.958 51.816,47.228 51.816,47.812 52.324,48.32 62.932,48.32 65.599,45.653 70.79,45.653 71.882,44.561 71.882,42.529 72.517,41.894 81.804,41.894 P7.3
AN_REFLECTIVE_CENTER: R17.1 U1.61 U7.3 | length 84.4
  Top Layer w0.254: v1(28.878,50.243) 27.354,50.243 25.222,52.375 25.222,80.086 27.051,81.915 30.734,81.915 32.512,83.693 32.512,87.273 33.631,88.392 35.203,88.392 40.08,83.515 v1(46.05,83.515) ; v1(39.37,52.07) 40.023,51.417 42.131,51.417 44.75,48.798 U1.61
  Bottom Layer w0.254: v1(28.878,50.243) 28.926,50.29 29.589,50.29 30.017,50.718 31.705,50.718 33.105,52.118 39.322,52.118 v1(39.37,52.07) ; v1(46.05,83.515) 46.1,83.565 U7.3
AN_REFLECTIVE_LEFT: R15.1 U1.64 U6.3 | length 77
  Top Layer w0.254: v1(23.749,82.931) 23.927,82.753 23.927,51.741 27.197,48.471 30.945,48.471 v1(30.988,48.514) ; v1(37.646,50.346) 37.915,50.346 38.276,49.985 40.84,49.985 U1.64
  Bottom Layer w0.254: U6.3@6.035,87.965 R15.1 6.035,84.008 6.731,83.312 23.368,83.312 v1(23.749,82.931) ; v1(30.988,48.514) 30.702,48.514 30.65,48.566 30.65,49.23 30.843,49.422 32.435,49.422 32.67,49.657 32.766,49.657 33.455,50.346 v1(37.646,50.346)
AN_REFLECTIVE_RIGHT: R19.1 U1.60 U8.3 | length 75.9
  Top Layer w0.254: v1(44.937,49.911) 44.937,49.844 45.25,49.531 U1.60 ; v1(62.992,58.166) 62.992,58.954 62.205,59.742 62.205,77.699 63.068,78.562 66.37,78.562 66.675,78.867 v1(66.929,78.867)
  Bottom Layer w0.254: v1(44.937,49.911) 44.937,49.844 45.997,48.784 49.69,48.784 51.419,50.513 51.419,51.402 53.992,53.975 58.801,53.975 v1(62.992,58.166) ; v1(66.929,78.867) 67.437,78.867 71.12,82.55 84.709,82.55 86.172,84.013 R19.1 86.2,85.61 U8.3
BACK_MOTOR_STBY: U1.22 U5.19 | length 28.4
  Top Layer w0.254: U1.22 45.75,34.307 44.463,33.02 42.451,33.02 39.64,30.209 39.64,23.131 40.511,22.26 45.348,22.26 45.361,22.273 46.215,22.273 v1(47.066,21.422)
  Bottom Layer w0.254: U5.19 47.061,21.503 47.142,21.422 v1(47.066,21.422)
BACKLEFT_MOTOR_DIR1: U1.21 U5.17 | length 27.5
  Top Layer w0.254: U1.21 45.25,34.417 44.284,33.452 42.272,33.452 39.14,30.32 39.14,23.02 40.662,21.498 45.771,21.498 v1(45.771,21.447)
  Bottom Layer w0.254: U5.17 45.761,21.457 v1(45.771,21.447)
BACKLEFT_MOTOR_DIR2: U1.20 U5.16 | length 29.1
  Top Layer w0.254: U1.20 44.75,34.528 44.242,34.02 42.229,34.02 38.64,30.431 38.64,22.909 40.737,20.812 v1(45.085,20.812)
  Bottom Layer w0.254: v1(45.085,20.812) 45.085,24.54 U5.16 U5.16@45.111,23.759
BACKLEFT_MOTOR_PWM: U1.28 U5.15 | length 18.3
  Top Layer w0.254: v1(44.704,26.908) 45.339,27.543 49.784,27.543 50.8,28.559 50.8,32.496 48.75,34.546 U1.28
  Bottom Layer w0.254: U5.15 44.461,26.389 44.98,26.908 v1(44.704,26.908)
BACKRIGHT_MOTOR_DIR1: U1.23 U5.21 | length 31.1
  Top Layer w0.254: U1.23 46.25,34.196 44.574,32.52 42.561,32.52 40.14,30.099 40.14,23.241 40.69,22.692 45.169,22.692 45.182,22.704 48.908,22.704 49.276,22.336 v1(49.276,21.32)
  Bottom Layer w0.254: U5.21 48.361,22.235 v1(49.276,21.32)
BACKRIGHT_MOTOR_DIR2: U1.24 U5.22 | length 31.7
  Top Layer w0.254: U1.24 46.75,34.085 44.685,32.02 42.672,32.02 40.64,29.988 40.64,23.352 40.869,23.123 44.99,23.123 45.003,23.136 49.492,23.136 50.292,22.336 v1(50.292,21.32)
  Bottom Layer w0.254: U5.22 49.011,23.617 50.292,22.336 v1(50.292,21.32)
BACKRIGHT_MOTOR_PWM: U1.29 U5.23 | length 13.8
  Top Layer w0.254: U1.29 49.25,35.062 51.816,32.496 v1(51.816,27.924)
  Bottom Layer w0.254: U5.23 49.661,25.769 v1(51.816,27.924)
BLUETOOTH_CTS: P4.6
BLUETOOTH_RX: P4.2 U1.15 | length 30.2
  Top Layer w0.254: P4.2 20.32,42.88 20.32,39.1 22.473,36.947 23.599,36.947 24.986,35.56 38.853,35.56 40.14,36.847 40.14,38.467 40.423,38.75 U1.15
BLUETOOTH_TX: P4.3 U1.16 | length 46.1
  Top Layer w0.254: P4.3 23.98,44.584 22.352,46.212 16.764,46.212 15.24,44.688 15.24,38.592 17.317,36.515 23.323,36.515 24.779,35.06 38.964,35.06 40.64,36.736 40.64,37.465 U1.16
DEBUG_RX: P3.3 U1.13 | length 22.3
  Top Layer w0.254: P3.3 23.98,37.98 25.4,36.56 38.632,36.56 39.14,37.068 39.14,38.688 40.202,39.75 U1.13
DEBUG_TX: P3.2 U1.14 | length 24
  Top Layer w0.254: P3.2 21.44,39.813 25.193,36.06 38.743,36.06 39.64,36.957 39.64,38.578 40.312,39.25 U1.14
EN_IR_BACK: P9.4
EN_IR_FRONTLEFT: P6.4 U1.10 | length 71.5
  Top Layer w0.254: P6.4 15.18,83.499 16.256,82.423 22.225,82.423 23.063,81.585 v1(23.063,47.549) ; v1(24.638,45.974) 31.877,45.974 33.401,44.45 33.401,43.434 32.639,42.672 31.75,42.672 31.242,42.164 31.242,41.402 31.877,40.767 33.528,40.767 34.011,41.25 U1.10
  Bottom Layer w0.254: v1(23.063,47.549) v1(24.638,45.974)
EN_IR_FRONTRIGHT: P5.4 U1.43 | length 57
  Top Layer w0.254: U1.43 55.95,43.25 58.928,46.228 62.738,46.228 63.627,45.339 v1(64.135,45.339) ; v1(65.532,46.736) 66.539,46.736 70.155,50.352 70.155,84.485 P5.4
  Bottom Layer w0.254: v1(64.135,45.339) 64.135,45.593 65.278,46.736 v1(65.532,46.736)
EN_IR_LEFT: P8.4
EN_IR_RIGHT: P7.4
FRONT_MOTOR_STBY: U1.18 U4.19 | length 30.4
  Top Layer w0.254: v1(41.529,35.433) 41.91,35.433 42.291,35.052 43.688,35.052 43.75,35.114 U1.18 ; v1(45.339,56.007) v1(46.736,56.007)
  Bottom Layer w0.254: v1(41.529,35.433) 41.529,54.229 43.307,56.007 v1(45.339,56.007) ; U4.19 46.736,57.881 v1(46.736,56.007)
FRONTLEFT_MOTOR_DIR1: U1.5 U4.21 | length 33
  Top Layer w0.254: U1.5 37.315,43.75 34.552,46.513 34.552,49.902 45.356,60.706 47.244,60.706 47.498,60.452 v1(47.498,60.071)
  Bottom Layer w0.254: U4.21 45.365,59.081 45.593,59.309 46.736,59.309 v1(47.498,60.071)
FRONTLEFT_MOTOR_DIR2: U1.4 U4.22 | length 29.3
  Top Layer w0.254: U1.4 37.522,44.25 35.052,46.72 35.052,49.695 45.428,60.071 v1(46.355,60.071)
  Bottom Layer w0.254: U4.22 44.715,59.32 45.466,60.071 v1(46.355,60.071)
FRONTLEFT_MOTOR_PWM: U1.30 U4.23 | length 58.2
  Top Layer w0.254: U1.30 49.75,35.173 51.334,33.588 58.988,33.588 v1(60.59,35.19) ; v1(58.166,60.833) 58.166,52.07 v1(58.801,51.435)
  Bottom Layer w0.254: U4.23 44.065,60.94 44.577,61.452 49.657,61.452 51.025,60.084 56.909,60.084 57.658,60.833 v1(58.166,60.833) ; v1(58.801,51.435) 58.801,49.022 59.69,48.133 59.69,36.091 v1(60.59,35.19)
FRONTRIGHT_MOTOR_DIR1: U1.6 U4.17 | length 34.4
  Top Layer w0.254: U1.6 37.108,43.25 34.052,46.306 34.052,50.109 45.106,61.163 47.549,61.163 48.514,60.198 v1(48.514,60.071)
  Bottom Layer w0.254: U4.17 47.965,59.522 v1(48.514,60.071)
FRONTRIGHT_MOTOR_DIR2: U1.7 U4.16 | length 37.4
  Top Layer w0.254: U1.7 36.901,42.75 33.552,46.099 33.552,50.316 44.831,61.595 48.133,61.595 v1(49.657,60.071)
  Bottom Layer w0.254: U4.16 48.615,59.029 v1(49.657,60.071)
FRONTRIGHT_MOTOR_PWM: U1.31 U4.15 | length 45.5
  Top Layer w0.254: U1.31 50.25,35.283 51.513,34.02 57.642,34.02 v1(59.182,35.56) ; v1(57.404,59.69) 57.404,51.562 v1(57.531,51.435)
  Bottom Layer w0.254: U4.15 49.276,57.963 49.276,58.912 49.784,59.42 57.134,59.42 v1(57.404,59.69) ; v1(57.531,51.435) 57.531,49.657 59.182,48.006 v1(59.182,35.56)
GND: C1.1 C2.1 C3.1 C4.1 C5.1 C6.1 C7.1 C8.1 C9.1 C10.1 C11.1 C12.1 C13.1 C14.1 C15.1 C16.1 C17.1 C18.1 C19.1 C21.1 C22.2 C23.2 C24.1 C25.1 C26.2 C27.2 C28.1 C29.1 D2.2 D3.2 D4.2 IRR1.0 IRR2.0 J1.2 J1.3 J1.5 P1.1 P3.4 P4.1 P4.4 P5.1 P6.1 P7.1 P8.1 P9.1 P14.1 R8.1 R9.1 S1.1 S1.3 S2.1 S2.3 U1.3 U1.12 U1.27 U1.32 U1.34 U1.35 U1.39 U1.55 U2.4 U3.6 U3.7 U3.9 U4.3 U4.4 U4.9 U4.10 U4.18 U5.3 U5.4 U5.9 U5.10 U5.18 U6.2 U6.4 U7.2 U7.4 U8.2 U8.4 VR1.1 VR2.1 | length 324
  Top Layer w0.203: v1(45.085,41.021) v1(45.085,42.799)
  Top Layer w0.254: R9.1 U2.4@18.748,91.612 ; U2.4 18.965,91.673 20.193,90.445 20.193,87.884 20.955,87.122 21.971,87.122 22.8,86.293 P6.1 ; P3.4 28.812,37.708 C8.1 37.216,37.708 39.758,40.25 U1.12 ; IRR1.0 31.734,91.17 v1(31.75,91.186) ; v1(34.476,4.25) S2.3 ; S2.1 36.411,7.658 36.83,7.239 42.029,7.239 P9.1 ; v1(37.592,91.948) 39.227,93.583 D2.2 ; U1.3 39.562,44.75 38.862,45.45 C10.1 C11.1 35.942,46.786 35.484,47.244 35.484,49.516 42.61,56.642 47.625,56.642 v1(47.879,56.388) 47.879,55.626 46.847,54.594 C14.1 C13.1 C9.1 ; v1(43.18,29.972) 44.146,29.006 C15.1 C12.1 C7.1 49.718,29.006 49.784,28.94 50.292,29.448 50.292,31.988 48.25,34.03 U1.27 48.25,38.09 v1(48.641,38.481) ; v1(49.276,45.847) 48.133,45.847 47.75,46.23 U1.55 47.75,51.732 C9.1 ; v1(49.276,54.483) 49.276,53.258 C9.1 ; v1(49.276,90.805) 49.845,91.374 R8.1 52.136,91.374 53.025,90.485 J1.3 J1.5 ; U1.32 53.67,36.425 v1(54.406,37.161) 54.406,37.134 C6.1@55.814,37.134 ; U1.34 52.62,38.705 54.243,38.705 ; U1.35 53.698,39.25 54.243,38.705 ; U1.39 57.286,41.25 59.624,38.912 C17.1 61.545,38.912 v1(61.595,38.862) ; v1(53.594,12.446) 53.61,12.462 C5.1 ; C6.1 C6.1@55.814,37.134 ; J1.2 v1@58.486,91.755 ; S1.3 S1.1 59.041,4.332 v1(59.055,4.318) ; v1(68.58,38.989) C16.1 ; 54.243,38.705 C6.1@55.814,37.134
  Top Layer w0.508: v1(37.338,27.051) 37.649,27.362 37.649,31.426 v1(40.132,33.909)
  Top Layer w0.762: v1(37.719,70.866) 37.735,70.882 D3.2 D4.2 ; v1(47.117,72.517) 47.782,71.852 VR1.1 ; VR2.1 50.657,63.881 52.832,63.881 53.467,63.246 v1(53.594,63.246) ; v1(51.054,74.803) 51.385,74.472 C1.1 53.462,74.472 C3.1 ; C2.1 52.964,67.228 C4.1 ; v1(54.61,68.326) C4.1 ; v1(57.912,67.31) 57.83,67.228 C4.1
  Top Layer w1.016: v3(53.467,17.51) 53.594,17.51 v3(53.594,25.003)
  Bottom Layer w0.203: v1(45.085,42.799) 45.476,42.408 U3.9
  Bottom Layer w0.254: U6.4 6,90.52 7.8,88.72 U6.2 ; C28.1 46.411,28.061 U5.18 ; U4.18 47.315,56.952 v1(47.879,56.388)
  Bottom Layer w1.016: v1(37.719,70.866) 36.322,72.263 36.068,72.263 ; C23.2 37.252,55.226 34.163,58.315 v3(34.163,59.293) ; P1.1 40.767,83.312 36.996,79.541 35.091,79.541 33.782,78.232 33.782,74.549 36.068,72.263 ; 44.794,17.566 44.794,16.023 45.466,15.351 48.641,15.351 ; 45.085,65.008 44.926,64.849 44.926,63.071 44.323,62.468 ; 48.587,17.566 48.641,17.512 48.641,15.351 ; 48.826,64.952 49.054,64.724 49.054,63.643 47.879,62.468 44.323,62.468 ; v3(53.467,17.51) 53.467,16.494 52.324,15.351 48.641,15.351 ; v3(53.594,25.003) 53.594,29.702 49.387,33.909 v1(40.132,33.909) 39.497,33.909 36.846,36.56 36.83,36.56 35.179,38.211 35.179,45.593 40.64,51.054 40.64,53.34 36.576,53.34 34.163,55.753 v3(34.163,59.293) ; v3(34.163,59.293) 34.163,60.325 36.068,62.23 36.068,63.23 ; 36.068,63.23 36.068,72.263 ; 36.068,63.23 36.83,62.468 44.323,62.468
  other v1: 58.547,91.694
IR_CLOSE_EN: U1.17 U2.3 | length 92.1
  Top Layer w0.254: U2.3@21.23,91.694 U2.3 21.209,92.329 20.574,92.964 15.367,92.964 14.732,92.329 14.732,88.392 16.383,86.741 16.383,83.693 17.221,82.855 22.404,82.855 23.495,81.764 23.495,49.022 25.019,47.498 v1(30.353,47.498) ; v1(30.48,34.29) 39.116,34.29 41.251,36.425 U1.17
  Bottom Layer w0.254: v1(30.353,47.498) 30.48,47.371 v1(30.48,34.29)
NetC1_2: C1.2 C2.2 F1.1 VR1.3 VR2.3 | length 28.2
  Top Layer w1.016: F1.1 49.29,79.549 VR1.3 49.37,76.372 C1.2 54.311,76.372 57.658,73.025 57.658,69.58 52.512,69.58 C2.2 49.37,69.768 VR2.3
NetC12_2: C12.2 C13.2 C14.2 C15.2 U1.25 U1.56 | length 16.2
  Top Layer w0.254: C14.2 C13.2 46.04,51.292 46.736,51.292 47.25,50.778 U1.56 U1.56@47.295,47.53 ; C15.2 C12.2 47.25,31.166 U1.25
NetC16_2: C16.2 R3.1 Y1.1 | length 10.3
  Top Layer w0.254: R3.1 60.96,45.13 61.656,44.434 63.518,44.434 Y1.1 68.138,41.64 C16.2
NetC17_2: C17.2 U1.40 Y1.2 | length 10.4
  Top Layer w0.254: U1.40 59.006,41.75 C17.2 61.384,40.812 Y1.2
NetC20_1: C20.1 U3.8 | length 2
  Bottom Layer w0.203: C20.1@44.196,42.214 44.402,42.008 U3.8
NetC21_2: C21.2 U3.4 | length 2.6
  Bottom Layer w0.203: U3.4 50.305,41.608 C21.2
NetD1_1: D1.1 S3.1 | length 6.9
  Top Layer w1.27: S3.1 34.417,83.312 35.814,81.915 D1.1
NetD2_1: D2.1 R1.1 | length 1.8
  Top Layer w0.254: R1.1 D2.1@41.59,93.579
NetD5_2: D5.2 D6.1 | length 60.7
  Top Layer w0.254: D6.1@26.73,83.236 D6.1
  Top Layer w0.381: D6.1 28.307,82.423 30.226,82.423 31.877,84.074 31.877,87.757 v1(32.639,88.519) ; v1(40.64,90.17) 42.037,90.17 45.756,93.889 67.909,93.889 69.469,92.329 69.469,86.487 D5.2@67.27,84.288
  Bottom Layer w0.381: v1(32.639,88.519) 34.29,90.17 v1(40.64,90.17)
NetD6_2: D6.2 U2.1 | length 11
  Top Layer w0.254: U2.1 25.765,85.217 28.956,85.217 29.27,84.903 D6.2
NetP1_2: P1.2 S3.2 | length 7.8
  Top Layer w1.27: S3.2 37.989,88.249 P1.2
NetP10_1: P10.1 U4.1 U4.2 | length 13.8
  Bottom Layer w1.016: P10.1 43.688,67.877 43.688,65.269 U4.1@43.415,65.269
NetP10_2: P10.2 U4.5 U4.6 | length 18.9
  Bottom Layer w1.016: P10.2 38.481,78.105 46.454,70.132 46.454,64.952
NetP11_1: P11.1 U4.11 U4.12 | length 13.7
  Bottom Layer w1.016: 50.248,64.952 50.565,65.269 50.565,68.003 P11.1
NetP11_2: P11.2 U4.7 U4.8 | length 16.8
  Bottom Layer w1.016: 47.648,65.462 47.648,67.626 P11.2
NetP12_1: P12.1 U5.1 U5.2 | length 16
  Bottom Layer w0.508: U5.2 U5.1
  Bottom Layer w0.762: U5.1 57.404,24.659 P12.1
NetP12_2: P12.2 U5.5 U5.6 | length 23
  Bottom Layer w0.381: U5.6 47.061,19.009 47.711,19.659 U5.5
  Bottom Layer w0.762: 47.711,19.659 47.848,19.796 50.8,19.796 55.804,24.8 55.804,30.896 P12.2
NetP13_1: P13.1 U5.11 U5.12 | length 23.3
  Bottom Layer w0.762: P13.1@36.068,32.496 34.544,32.496 34.036,31.988 34.036,22.844 39.314,17.566 U5.12 U5.11@43.727,17.566
NetP13_2: P13.2 U5.7 U5.8 | length 22.2
  Bottom Layer w0.381: 45.72,19.288 45.761,19.247 ; U5.8 45.761,19.247 ; U5.7 46.411,19.105 46.269,19.247 45.761,19.247
  Bottom Layer w0.762: P13.2@36.068,29.956 36.068,22.844 39.624,19.288 45.72,19.288
NetP14_2: P14.2 P15.2 | length 3.6
  Bottom Layer w0.762: P14.2 P15.2
NetR3_2: R3.2 U1.41 | length 7.8
  Top Layer w0.254: U1.41 52.62,42.205 58.919,42.205 R3.2
NetR9_2: R9.2 U2.5 U2.6 | length 3.4
  Top Layer w0.254: R9.2 18.748,89.712 U2.6 U2.5
NetR14_1: R14.1 U6.1 | length 2.9
  Bottom Layer w0.254: U6.1 R14.1@10.661,92
NetR16_1: R16.1 U7.1 | length 3.2
  Bottom Layer w0.254: U7.1 51.047,92 R16.1
NetR18_1: R18.1 U8.1 | length 2.9
  Bottom Layer w0.254: U8.1 88.007,91.993 R18.1
RESET: C5.2 J1.10 R2.1 S1.2 S1.4 U1.38 | length 141.8
  Top Layer w0.254: U1.38 56.008,40.75 59.055,37.703 68.945,37.703 ; C5.2 R2.1 ; C5.2@55.715,10.346 S1.4 S1.2 55.715,3.34 56.896,2.159 68.453,2.159 70.485,4.191 70.485,36.163 68.945,37.703 ; J1.10 57.724,86.675 60.071,84.328 v1(60.071,83.312) ; v1(62.103,83.312) 62.23,83.312 62.814,82.728 67.132,82.728 69.723,80.137 69.723,50.8 v1(66.294,47.371) ; v1(66.294,44.577) 70.104,44.577 70.739,43.942 70.739,39.497 68.945,37.703
  Bottom Layer w0.254: v1(60.071,83.312) v1(62.103,83.312) ; v1(66.294,44.577) v1(66.294,47.371)
SERVO_CONTROL: P14.3 U1.1 | length 39.8
  Top Layer w0.254: U1.1 45.952,45.75 47.319,44.383 49.709,44.383 52.248,46.922 52.248,47.431 52.705,47.888 62.729,47.888 65.396,45.221 70.611,45.221 71.374,44.458 71.374,41.005 72.263,40.116 P14.3
START_BUTTON: R4.1 S2.2 S2.4 U1.19 | length 31.5
  Top Layer w0.254: S2.2@38.161,8.6 R4.1 38.208,10.715 38.208,30.609 42.051,34.452 44.063,34.452 44.25,34.639 U1.19
TCLK: J1.7 R8.2 U1.52 | length 81.5
  Top Layer w0.254: U1.52 49.25,48.798 50.704,50.252 66.381,50.252 67.869,51.74 67.869,79.197 66.675,80.391 52.221,80.391 49.225,83.387 49.225,88.722 49.977,89.474 R8.2 52.512,89.474 54.041,87.945 J1.7
TDI: J1.9 R7.1 U1.50 | length 79.5
  Top Layer w0.254: U1.50 50.25,48.577 50.925,49.252 66.795,49.252 68.783,51.24 68.783,79.68 66.675,81.788 51.435,81.788 49.657,83.566 49.657,86.741 50.48,87.564 R7.1 53.152,87.564 54.041,86.675 J1.9
TDO: J1.8 R6.1 U1.49 | length 66
  Top Layer w0.254: U1.49 51.927,48.752 67.002,48.752 69.215,50.965 69.215,80.01 66.929,82.296 61.976,82.296 61.087,83.185 R6.1 60.071,85.471 57.597,87.945 J1.8
TMS: J1.6 R5.1 U1.51 | length 71.4
  Top Layer w0.254: U1.51 49.75,48.688 50.814,49.752 66.588,49.752 68.351,51.515 68.351,79.477 66.675,81.153 v1(63.246,81.153) ; J1.6 58.481,89.215 60.447,91.181 R5.1 62.235,91.181 62.611,90.805 62.611,88.265 63.119,87.757 v1(63.119,87.63)
  Bottom Layer w0.254: v1(63.119,87.63) 63.246,87.503 v1(63.246,81.153)
VBAT: C23.1 C25.2 C27.1 C29.2 D1.2 F1.2 P15.1 U4.13 U4.14 U4.24 U5.13 U5.14 U5.24 | length 157.6
  Top Layer w0.508: 52.308,61.849 58.42,61.849 59.309,60.96 59.309,53.213 61.595,50.927 v1(63.119,50.927) ; v1(68.961,46.863) 71.882,46.863 73.66,45.085 P15.1
  Top Layer w1.016: v2(32.258,47.879) 32.385,48.006 32.385,50.546 36.576,54.737 v3(36.576,59.928) ; v2(43.434,27.559) 43.434,25.146 44.069,24.511 v2(51.562,24.511) ; F1.2 D1.2 41.874,80.736 41.021,79.883 35.179,79.883 33.782,78.486 33.782,74.549 36.068,72.263 36.068,60.436 v3(36.576,59.928) ; v2(53.213,57.912) 53.213,60.944 52.308,61.849 51.689,62.468 39.116,62.468 v3(36.576,59.928)
  Bottom Layer w0.254: C27.1 C27.1@38.92,24.688
  Bottom Layer w0.508: U5.13 43.434,24.566 ; v1(63.119,50.927) 64.897,50.927 v1(68.961,46.863)
  Bottom Layer w0.762: C27.1 41.09,24.746 C29.2 41.27,24.566 U5.13
  Bottom Layer w1.016: v2(32.258,47.879) 33.655,46.482 33.655,37.449 43.434,27.67 v2(43.434,27.559) 43.434,24.566 ; v3(36.576,59.928) 38.478,58.026 C23.1 41.09,58.026 C25.2 43.072,58.084 43.204,57.952 ; 50.126,57.952 U4.13 53.173,57.952 v2(53.213,57.912) ; 50.522,24.566 50.577,24.511 v2(51.562,24.511)
pads on no net: J1.0 J1.4 U1.33 U1.36 U1.44 U1.53

## Polygon pours and split planes (outlines as drawn)
GND on Bottom Layer "GND Plane" (solid, remove dead copper, pour order 3): 22.5,0 22.5,35 0,35 0,49 22.5,49 22.5,80.75 0,80.75 0,94.75 94,94.75 94,80.75 71.5,80.75 71.5,49 94,49 94,35 71.5,35 71.5,0

## Silkscreen, mask and mechanical layers (free items; w line width, h text height)
Top Overlay:
  lines w0.2: 22.606,8.577 25.789,8.577 ; 22.606,11.117 32.766,11.117 ; 22.606,13.657 32.766,13.657 ; 22.606,24.825 22.606,31.12 cw(c25.146,31.12) 25.146,33.66 30.226,33.66 cw(c30.226,31.12) 32.766,31.12 ; 22.606,27.31 32.766,27.31 ; 22.606,29.85 25.789,29.85 ; 22.606,54.297 25.789,54.297 ; 22.606,56.837 32.766,56.837 ; 22.606,59.377 32.766,59.377 ; 22.606,70.545 22.606,76.84 cw(c25.146,76.84) 25.146,79.38 30.226,79.38 cw(c30.226,76.84) 32.766,76.84 ; 22.606,73.03 32.766,73.03 ; 22.606,75.57 25.789,75.57 ; 27.054,10.769 25.689,8.405 27.054,6.04 29.785,6.04 31.15,8.405 29.785,10.769 ; 27.054,27.658 25.689,30.023 27.054,32.388 29.785,32.388 31.15,30.023 29.785,27.658 ; 27.054,56.489 25.689,54.125 27.054,51.76 29.785,51.76 31.15,54.125 29.785,56.489 ; 27.054,73.378 25.689,75.743 27.054,78.108 29.785,78.108 31.15,75.743 29.785,73.378 ; 31.05,8.577 32.766,8.577 ; 31.05,29.85 32.766,29.85 ; 31.05,54.297 32.766,54.297 ; 31.05,75.57 32.766,75.57 ; 32.766,24.77 22.606,24.77 22.606,7.307 ccw(c25.146,7.307) 25.146,4.767 30.226,4.767 ccw(c30.226,7.307) 32.766,7.307 32.766,27.162 ; 32.766,31.226 32.766,14.163 32.766,14.194 32.767,14.225 32.767,14.258 32.768,14.29 32.768,14.323 ; 32.766,70.49 22.606,70.49 22.606,53.027 ccw(c25.146,53.027) 25.146,50.487 30.226,50.487 ccw(c30.226,53.027) 32.766,53.027 32.766,72.882 ; 32.766,76.946 32.766,59.883 32.766,59.914 32.767,59.945 32.767,59.978 32.768,60.01 32.768,60.043 ; 61.212,23.999 61.212,24.032 61.213,24.064 61.213,24.097 61.214,24.128 61.214,24.159 61.214,7.096 ; 61.212,69.719 61.212,69.752 61.213,69.784 61.213,69.817 61.214,69.848 61.214,69.879 61.214,52.816 ; 61.214,7.202 ccw(c63.754,7.202) 63.754,4.662 68.834,4.662 ccw(c68.834,7.202) 71.374,7.202 71.374,13.497 ; 61.214,8.472 62.93,8.472 ; 61.214,11.012 71.374,11.012 ; 61.214,11.16 61.214,31.015 cw(c63.754,31.015) 63.754,33.555 68.834,33.555 cw(c68.834,31.015) 71.374,31.015 71.374,13.552 61.214,13.552 ; 61.214,24.665 71.374,24.665 ; 61.214,27.205 71.374,27.205 ; 61.214,29.745 62.93,29.745 ; 61.214,52.922 ccw(c63.754,52.922) 63.754,50.382 68.834,50.382 ccw(c68.834,52.922) 71.374,52.922 71.374,59.217 ; 61.214,54.192 62.93,54.192 ; 61.214,56.732 71.374,56.732 ; 61.214,56.88 61.214,76.735 cw(c63.754,76.735) 63.754,79.275 68.834,79.275 cw(c68.834,76.735) 71.374,76.735 71.374,59.272 61.214,59.272 ; 61.214,70.385 71.374,70.385 ; 61.214,72.925 71.374,72.925 ; 61.214,75.465 62.93,75.465 ; 64.195,10.664 62.83,8.299 64.195,5.934 66.926,5.934 68.291,8.299 66.926,10.664 ; 64.195,27.553 62.83,29.917 64.195,32.282 66.926,32.282 68.291,29.917 66.926,27.553 ; 64.195,56.384 62.83,54.019 64.195,51.654 66.926,51.654 68.291,54.019 66.926,56.384 ; 64.195,73.273 62.83,75.637 64.195,78.002 66.926,78.002 68.291,75.637 66.926,73.273 ; 68.191,8.472 71.374,8.472 ; 68.191,29.745 71.374,29.745 ; 68.191,54.192 71.374,54.192 ; 68.191,75.465 71.374,75.465
  text "Reset" at 53.213,1.651 h1.52
  text "Start" at 34.163,1.524 h1.52
Bottom Overlay:
  text "Kimarite1" at 54.61,11.43 h2
  text "Designed By: Anthony Merlino" at 60.833,5.715 h1
  text "Dillon Buck" at 48.133,4.191 h1
  text "c 2014" at 47.921,2.52 h1
  text "o" at 48.346,2.045 h2.54
  text "Rowan University" at 70.358,1.143 h1
Mechanical 2:
  the board outline again, w0.013